# Allegro board ARDUINO_.brd
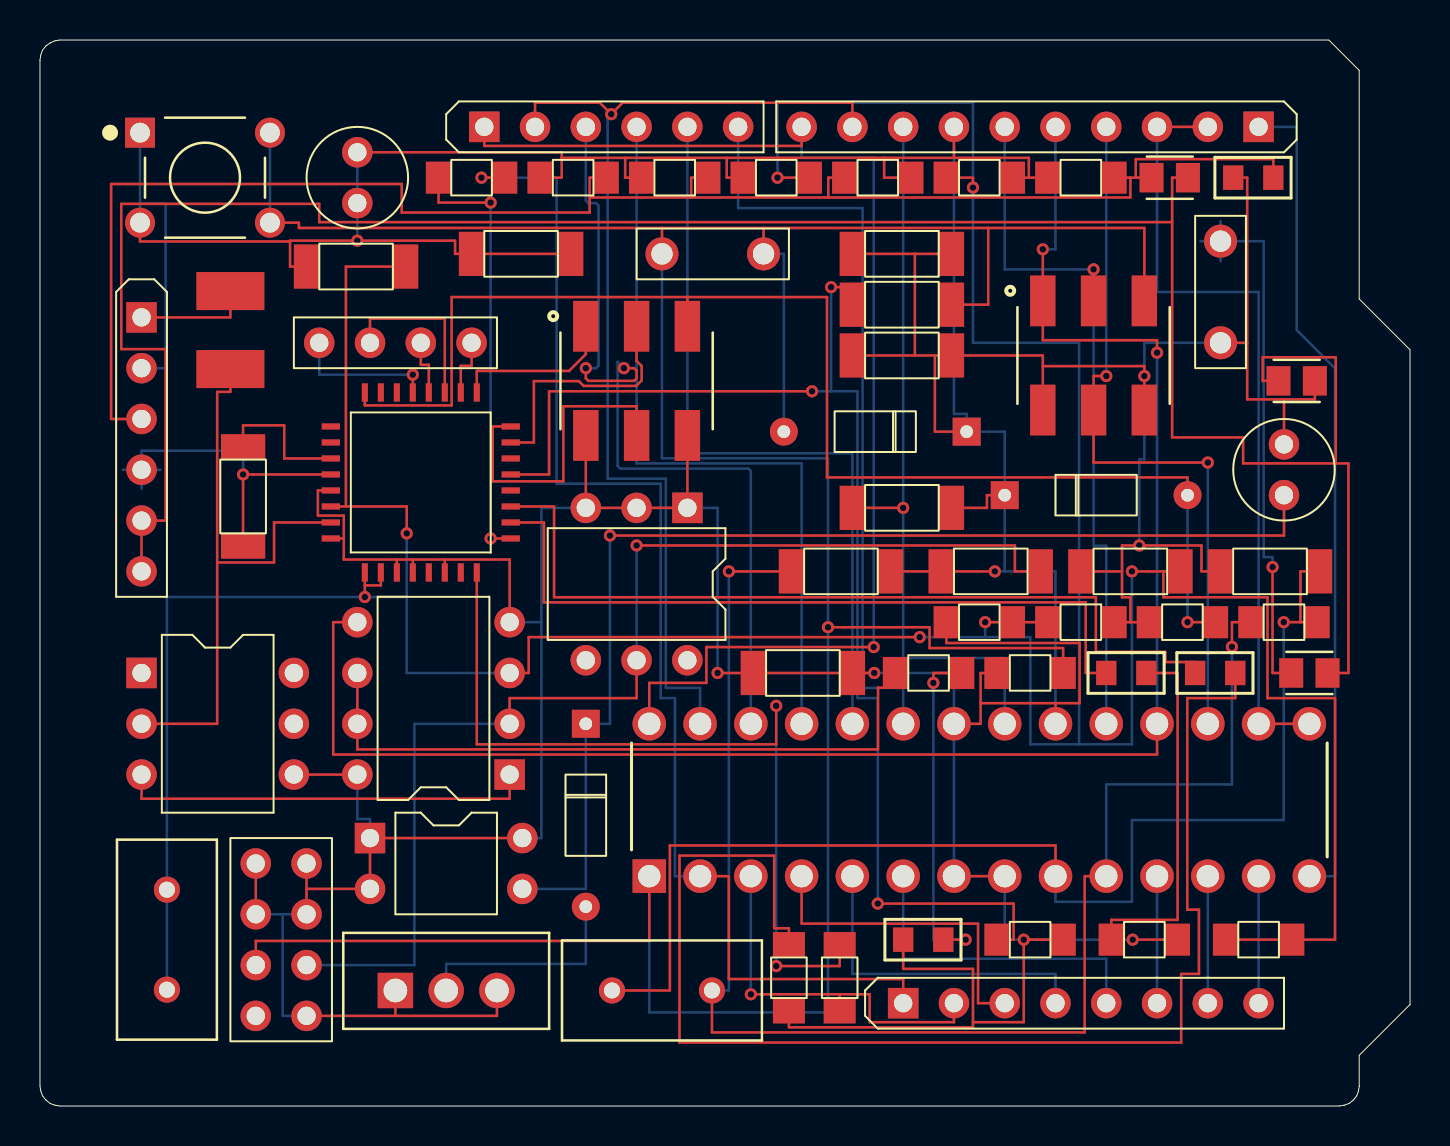
[diagram p0: board, top side]
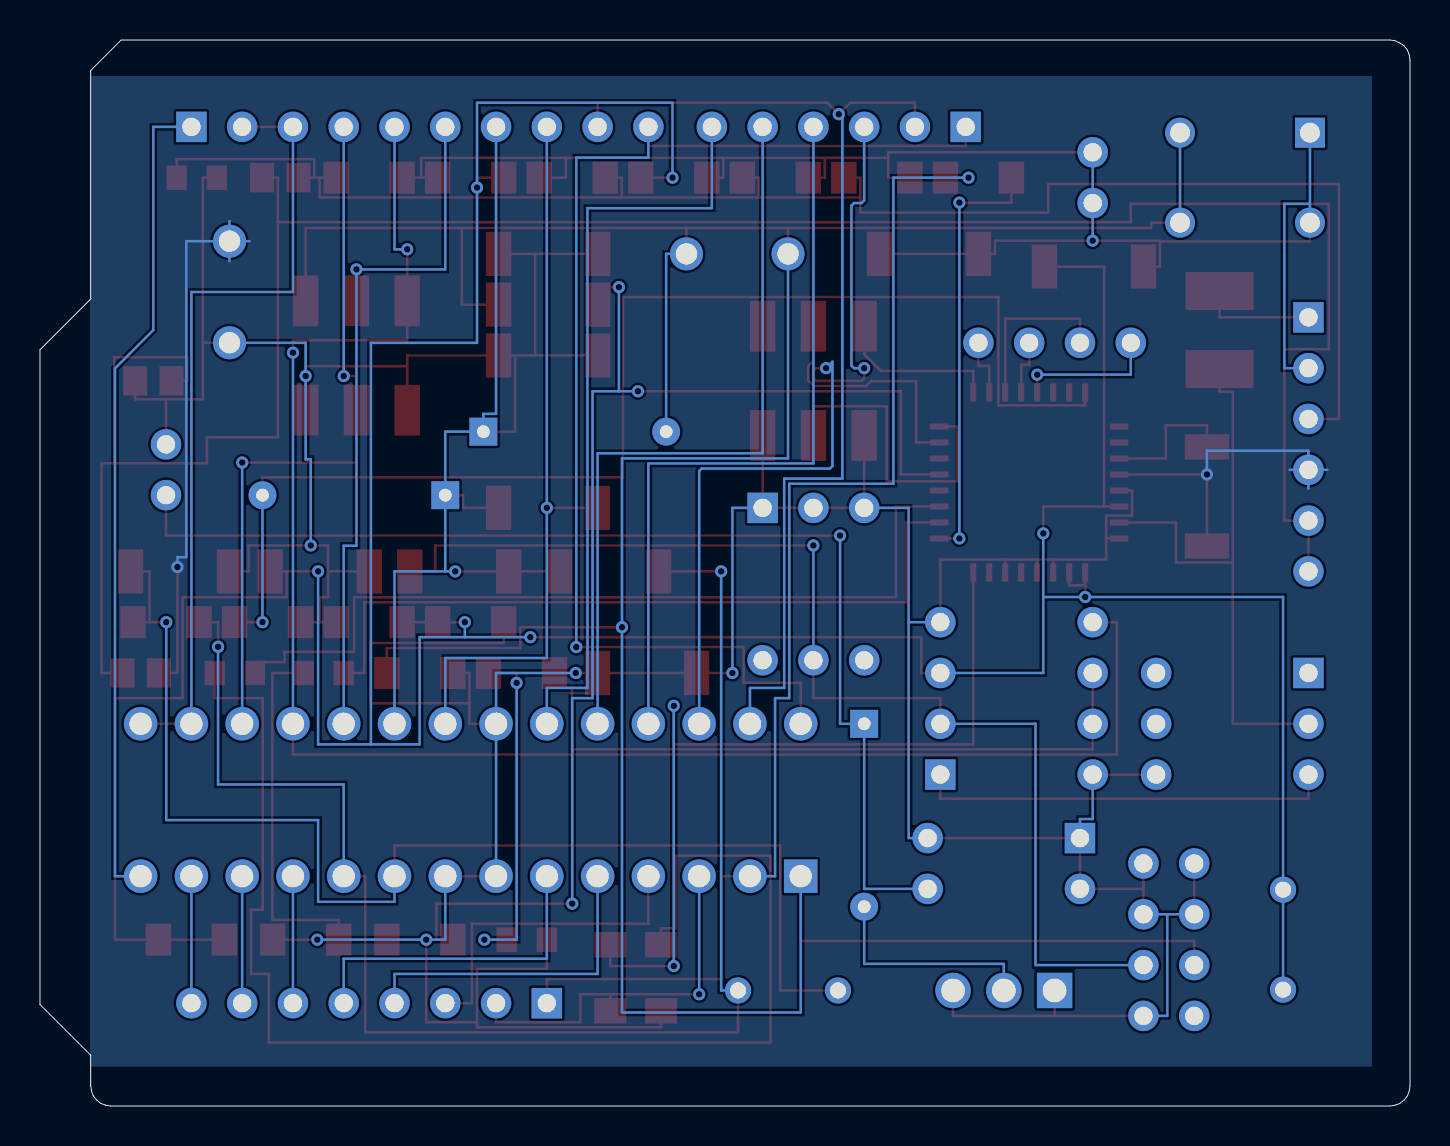
[diagram p1: board, bottom side, seen from below]

Outline 68.53 x 53.3 mm; copper layers: TOP, BOTTOM. Coordinates in mm from the lower left corner of the outline.
Outline path: 0,52.28 0,0.99 0.04,0.74 0.13,0.51 0.3,0.3 0.51,0.13 0.74,0.04 0.99,0 65,0 65.25,0.04 65.49,0.13 65.7,0.3 65.87,0.51 65.95,0.74 66,0.99 66,2.54 68.53,5.08 68.53,37.81 66,40.35 66,51.78 64.47,53.3 0.99,53.3 0.74,53.26 0.51,53.15 0.3,53 0.13,52.79 0.04,52.56 0,52.28

## Design rules (mm)
constraint set DEFAULT: min track width 0.127

## Placement (name value [footprint] x y rotation side)
C1  100n  [SMDCAP]  43.18 37.53 0 top
C2  100n  [SMDCAP]  24.13 42.61 0 top
C3  1u  [SMDCAP]  47.62 26.73 0 top
C4  100n  [SMDCAP]  43.18 29.91 0 top
C5  100n  [SMDCAP]  43.18 40.07 0 top
C6  100n  [SMDCAP]  43.18 42.61 0 top
C7  100n  [SMDCAP]  38.1 21.65 180 top
C8  1u  [SMDCAP]  10.16 30.54 90 top
C9  22p  [SMDCAP]  54.61 26.73 0 top
C11  22p  [SMDCAP]  15.88 41.97 0 top
C12  22p  [SMDCAP]  40 26.73 180 top
C13  22p  [SMDCAP]  61.59 26.73 0 top
CSTCE16M0V53-R0  16MHz  [16M]  31.11 5.78 0 top
D1  M7  [DO35]  27.3 19.11 180 top
D2  CD1206-S01575  [DO35]  46.35 33.72 90 top
D3  CD1206-S01575  [DO35]  48.26 30.54 270 top
F1  500mA  [FUSE]  9.53 38.8 270 top
IC2  ATmega328P-PU  [ATMEGA3]  63.5 19.11 90 top
ICSP  3x2 M  [PIN6]  52.7 37.53 0 top
ICSP1  3x2 M  [PIN6]  29.84 36.26 0 top
IOH  10x1F -H8.5  [SIP10]  60.96 48.96 270 top
IOL  8x1F -H8.5  [SIP8]  43.18 5.14 90 top
J1  CON6  [SIP6]  5.08 39.43 0 top
JP2  2X2 M - NM  [JUMPER4]  21.59 38.16 180 top
L  YELLOW  [SML0805]  43.18 8.32 0 top
L1  BLM21  [BE]  63.5 21.65 0 top
NOREF  -  []  0 0.99 90 top
NOREF#2  -  []  0.99 53.3 0 top
ON  GREEN  [SML0805]  59.69 46.42 0 top
PC1  47u  [CAP196]  62.23 30.54 0 top
PC2  47u  [CAP196]  15.88 45.15 0 top
POWER  8x1F -H8.5  [JUMPER8]  10.79 4.51 0 top
R1  1M  [SMDRES]  60.96 8.32 180 top
R2  1M  [SMDRES]  62.23 24.19 0 top
R12  10K  [SMDRES]  46.99 24.19 0 top
R13  10K  [SMDRES]  52.07 24.19 0 top
RESET-EN  SW KEY-SPST  [CAPCK06]  31.11 42.61 270 top
RN1C  10K  [SMDRES]  57.15 24.19 0 top
RN1D  10K  [SMDRES]  49.53 21.65 0 top
RN2A  1K  [SMDRES]  44.45 21.65 0 top
RN2B  1K  [SMDRES]  55.24 8.32 0 top
RN2C  1K  [SMDRES]  37.46 6.41 270 top
RN2D  1K  [SMDRES]  49.53 8.32 0 top
RN3A  22p  [SMDRES]  36.83 46.42 0 top
RN3B  22R  [SMDRES]  46.99 46.42 0 top
RN3C  22R  [SMDRES]  52.07 46.42 0 top
RN3D  22p  [SMDRES]  41.91 46.42 0 top
RN4A  1K  [SMDRES]  40 6.41 270 top
RN4B  1K  [SMDRES]  21.59 46.42 0 top
RN4C  1K  [SMDRES]  26.67 46.42 0 top
RN4D  1K  [SMDRES]  31.75 46.42 0 top
RX  YELLOW  [SML0805]  53.34 21.65 0 top
SW1  SW KEY-SPST  [CAPCK06]  59.05 38.16 0 top
SW2  RESET  [SW]  8.26 46.42 0 top
T1  FND340P  [DIP6_3]  5.08 21.65 0 top
TX  YELLOW  [SML0805]  57.78 21.65 0 top
U1  NUP1117ST50T3G  [DIP4_3]  16.51 13.4 0 top
U2  SP2985-33DBVR  [DIP6_3]  32.38 29.91 270 top
U3  ATMEGA16U2-MU(R)  [ATMEGA328]  19.05 31.18 90 top
U4  LM358  [DIP8_3]  23.5 16.57 180 top
UNK6X1F-H8.5  AD  [SIP6]  22.23 48.96 90 top
X1  POWERSUPPLY_DC21MMX  [X1]  17.78 5.78 0 top
Y1  16MHz  [16M]  6.35 8.32 90 top
Z1  CG0603ML C-05E  [BE]  56.51 46.42 0 top
Z2  CG0603MLC-05E  [BE]  62.87 36.26 180 top

## Library data of the parts
C1-C9 C11-C13 = CAP NP: Tolerance: ***; User Part Number: ***
CSTCE16M0V53-R0 Y1 = ZTA
D1-D3 = DIODE
F1 = FUSE
IC2 = ATMega8-TQFP32_2
ICSP ICSP1 = CON6A
IOH = CON10: User Part Number: ***
IOL POWER = CON8: User Part Number: ***
J1 = CON6_6: User Part Number: ***
JP2 = CON4A: User Part Number: ***
L ON RX TX = LED
L1 = BEAD
PC1 PC2 = CAP POL: Tolerance: ***; User Part Number: ***
R1 R2 R12 R13 RN1C RN1D RN2A RN2B RN2C RN2D RN3A RN3B RN3C RN3D RN4A RN4B RN4C RN4D = R2: Tolerance: ***; User Part Number: ***
RESET-EN SW1 = SW KEY-SPST: Tolerance: ***; User Part Number: ***
SW2 = SW PUSHBUTTON-SPST-2/SM_0
T1 = NDC7003P/SOT: Tolerance: ***; User Part Number: ***
U1 = NC7SZ66/SOT23_3: Tolerance: ***; User Part Number: ***
U2 = LP2957/TO_5: Tolerance: ***; User Part Number: ***
U3 = ATMega8-TQFP32_9
U4 = LM358_13: Tolerance: ***; User Part Number: ***
UNK6X1F-H8.5 = CON6_5: User Part Number: ***
X1 = BA17805T/TO_4
Z1 Z2 = VARISTOR

## Footprints (pads in the part's own frame, mm; a bottom-side part is the same pattern mirrored in y, then rotated)
16M
  round 1.308 hole 0.8: 1(-2.5,0) 2(2.5,0)
ATMEGA3
  rect 1.676x1.676 hole 1.118: 1(-7.62,33.02)
  round 1.676 hole 1.118: 2(-7.62,30.48) 3(-7.62,27.94) 4(-7.62,25.4) 5(-7.62,22.86) 6(-7.62,20.32) 7(-7.62,17.78) 8(-7.62,15.24) 9(-7.62,12.7) 10(-7.62,10.16) 11(-7.62,7.62) 12(-7.62,5.08) 13(-7.62,2.54) 14(-7.62,0) 15(0,0) 16(0,2.54) 17(0,5.08) 18(0,7.62) 19(0,10.16) 20(0,12.7) 21(0,15.24) 22(0,17.78) 23(0,20.32) 24(0,22.86) 25(0,25.4) 26(0,27.94) 27(0,30.48) 28(0,33.02)
ATMEGA328
  rect 0.914x0.305 smd: 1(-4.5,2.8) 2(-4.5,2) 3(-4.5,1.2) 4(-4.5,0.4) 5(-4.5,-0.4) 6(-4.5,-1.2) 7(-4.5,-2) 8(-4.5,-2.8) 17(4.5,-2.8) 18(4.5,-2) 19(4.5,-1.2) 20(4.5,-0.4) 21(4.5,0.4) 22(4.5,1.2) 23(4.5,2) 24(4.5,2.8)
  rect 0.305x0.914 smd: 9(-2.8,-4.5) 10(-2,-4.5) 11(-1.2,-4.5) 12(-0.4,-4.5) 13(0.4,-4.5) 14(1.2,-4.5) 15(2,-4.5) 16(2.8,-4.5) 25(2.8,4.5) 26(2,4.5) 27(1.2,4.5) 28(0.4,4.5) 29(-0.4,4.5) 30(-1.2,4.5) 31(-2,4.5) 32(-2.8,4.5)
BE
  rect 1.2x1.47 smd: 1(-0.91,0) 2(0.91,0)
CAP196
  round 1.524 hole 0.914: 1(0,0) 2(0,2.54)
CAPCK06
  round 1.651 hole 1.067: 1(0,0) 2(0,5.08)
DIP4_3
  rect 1.524x1.524 hole 0.914: 1(0,0)
  round 1.524 hole 0.914: 2(0,-2.54) 3(7.62,-2.54) 4(7.62,0)
DIP6_3
  rect 1.524x1.524 hole 0.914: 1(0,0)
  round 1.524 hole 0.914: 2(0,-2.54) 3(0,-5.08) 4(7.62,-5.08) 5(7.62,-2.54) 6(7.62,0)
DIP8_3
  rect 1.524x1.524 hole 0.914: 1(0,0)
  round 1.524 hole 0.914: 2(0,-2.54) 3(0,-5.08) 4(0,-7.62) 5(7.62,-7.62) 6(7.62,-5.08) 7(7.62,-2.54) 8(7.62,0)
DO35
  rect 1.397x1.397 hole 0.635: 1(0,0)
  round 1.397 hole 0.635: 2(0,9.144)
FUSE
  rect 1.9x3.4 smd: 1(-1.95,0) 2(1.95,0)
JUMPER4
  round 1.524 hole 0.914: 1(0,0) 2(2.54,0) 3(5.08,0) 4(7.62,0)
JUMPER8
  round 1.524 hole 0.914: 1(0,0) 2(2.54,0) 3(0,2.54) 4(2.54,2.54) 5(0,5.08) 6(2.54,5.08) 7(0,7.62) 8(2.54,7.62)
PIN6
  rect 1.27x2.54 smd: 1(-2.54,2.73) 2(-2.54,-2.73) 3(0,2.73) 4(0,-2.73) 5(2.54,2.73) 6(2.54,-2.73)
SIP6
  rect 1.524x1.524 hole 0.914: 1(0,0)
  round 1.524 hole 0.914: 2(0,-2.54) 3(0,-5.08) 4(0,-7.62) 5(0,-10.16) 6(0,-12.7)
SIP8
  rect 1.524x1.524 hole 0.914: 1(0,0)
  round 1.524 hole 0.914: 2(0,-2.54) 3(0,-5.08) 4(0,-7.62) 5(0,-10.16) 6(0,-12.7) 7(0,-15.24) 8(0,-17.78)
SIP10
  rect 1.524x1.524 hole 0.914: 1(0,0)
  round 1.524 hole 0.914: 2(0,-2.54) 3(0,-5.08) 4(0,-7.62) 5(0,-10.16) 6(0,-12.7) 7(0,-15.24) 8(0,-17.78) 9(0,-20.32) 10(0,-22.86)
SMDCAP
  rect 1.27x2.21 smd: 1(-2.54,0) 2(2.413,0)
SMDRES
  rect 1.27x1.6 smd: 1(-1.651,0) 2(1.651,0)
SML0805
  rect 1.016x1.219 smd: 1(0,0) 2(2.007,0)
SW
  rect 1.498x1.498 hole 0.99: 1(-3.25,2.25)
  round 1.498 hole 0.99: 2(-3.25,-2.25) 3(3.25,2.25) 4(3.25,-2.25)
X1
  rect 1.77x1.77 hole 1.18: 1(0,0)
  round 1.77 hole 1.18: 2(2.54,0) 3(5.08,0)

## Nets
+3V3: C3.2 POWER.4 U2.5(OUT) U4.2
+5V: C1.1 C1.2 C2.1 C2.2 C3.1 C4.2 C6.1 C6.2 C7.1 C7.2 C9.1 C11.1 C12.1 C13.1 D2.1(K) D3.1(K) IC2.7 IC2.8 IC2.20 IC2.22 ICSP.2 ICSP.6 ICSP1.2 ICSP1.6 IOH.7 J1.2 L.1(CATHODE) ON.1(CATHODE) PC1.2 PC2.1 PC2.2 POWER.2 POWER.5 POWER.6 POWER.7 POWER.8 R12.1 R13.2 RN1C.1 RN1D.1 RN2B.2 RN2C.2 RN2D.2 RN3A.1 RN3B.2 RN3C.1 RN3D.2 RN4C.1 RN4D.1 SW1.1 SW2.1 SW2.2 T1.4 U1.1 U1.2 U1.4(OUT) U2.1 U2.2 U2.3 U3.3 U3.4 U3.6 U3.29 U3.32 U4.4 U4.8 X1.1 X1.3 Z2.1
1: C9.2 C11.2 R1.1 R1.2 R12.2 R13.1 RN3A.2 RN3B.1 U3.1 U3.2(XTAL2(PC0)) U3.30 U4.3 Y1.1 Y1.2
5: J1.3 ON.2 RN3C.2 RN3D.1 RN4C.2 RN4D.2 Z1.1
AD0: IC2.23 UNK6X1F-H8.5.6
AD1: IC2.24 UNK6X1F-H8.5.5
AD2: IC2.25 UNK6X1F-H8.5.4
AD3: IC2.26 UNK6X1F-H8.5.3
AD4/SDA: IC2.27 IOH.9 UNK6X1F-H8.5.2
AD5/SCL: IC2.28 IOH.10 UNK6X1F-H8.5.1
AREF: C4.1 IC2.21 IOH.8
CSK2: ICSP1.3 U3.15
IO0: IC2.2 IOL.1 RN4B.2
IO1: IC2.3 IOL.2 RN4A.2
IO2: IC2.4 IOL.3
IO3: IC2.5 IOL.4
IO4: IC2.6 IOL.5
IO5: IC2.11 IOL.6
IO6: IC2.12 IOL.7
IO7: IC2.13 IOL.8
IO8: IC2.14 IOH.1
IO9: IC2.15 IC2.16 IOH.2 IOH.3
L13: RN2A.1 U4.6 U4.7(OUT)
M8RXD: RN4B.1 U3.9
M8TXD: RN4A.1 U3.8
MISO: IC2.17 ICSP.4 IOH.4
MISO2: ICSP1.1 U3.17
MOSI2: ICSP1.4 U3.16
PB4: JP2.1 U3.18
PB5: JP2.3 U3.19
PB6: JP2.2 U3.20
PB7: JP2.4 U3.21
PWRIN: D1.2 X1.2
RESET: C5.2 D2.2 IC2.1 ICSP.5 POWER.3 RESET-EN.1 RESET-EN.2 RN1D.2 SW2.3 SW2.4
RESET2: D3.2 ICSP1.5 RN1C.2 U3.24
RXLED: RX.1(CATHODE) U3.10
SCK: IC2.18 ICSP.1 IOH.5 U4.5
TP_VUCAP: C8.2 U3.27
TXLED: TX.1(CATHODE) U3.11
UGND: C8.1 J1.4 L1.1 SW1.2 U3.28
USBVCC: F1.2 T1.2 U3.31
USHIELD: J1.5 J1.6(PS2) L1.2 Z1.2 Z2.2
XTAL1: C13.2 CSTCE16M0V53-R0.1 IC2.9 R2.2
XTAL2: C12.2 CSTCE16M0V53-R0.2 IC2.10(XTAL2) R2.1
XUSB: F1.1 J1.1
N06680: C5.1 RN2D.1 U3.13
N09729: RN2C.1 TX.2
N10359: IC2.19 ICSP.3 IOH.6
N14807: T1.3 U4.1
N20263: D1.1(K) PC1.1 U1.3
N096150: RN2B.1 RX.2
N183381: L.2 RN2A.2

Pads without a net: POWER 1; T1 1 5 6; U2 4 6; U3 5 7 12 14 22 23 25 26

## Via types
v1: diameter 0.61, hole 0.33, TOP to BOTTOM, 46 vias

## Routing (per net, layer and track width the routed paths; a pad name or vN(x,y) marks a point on that pad's centre or on a via; arc(x,y) is an arc through that point)
+3V3: length 59
  TOP w0.127: U2.5 29.84,20.39 23.5,20.39 U4.2 ; C3.2 48.77,26.73 48.77,28.03 v1(29.84,28.03)
  BOTTOM w0.127: POWER.4 18.73,7.05 18.73,19.11 U4.2 ; v1(29.84,28.03) U2.5
+5V: length 411.5
  TOP w0.127: v1(33.9,21.65) C7.2 C7.1 v1(41.73,21.65) ; 45.72,47.41 IOH.7 ; 45.72,47.41 42.23,47.41 ; 45.72,47.41 49.47,47.41 49.47,46.42 ; C6.1 43.76,42.61 ; 43.76,42.61 C6.2 ; 43.76,42.61 43.76,37.53 ; D3.1 47.37,30.54 47.37,29.91 C4.2 ; 42.23,47.41 42.23,46.42 RN3D.2 ; 42.23,47.41 34.35,47.41 ; 13.34,10.86 U1.2 U1.1 U1.4 ; 13.34,10.86 POWER.6 ; 13.34,10.86 POWER.8 ; 50.8,20.14 52.01,20.14 52.01,23.15 45.34,23.15 R12.1 ; 50.8,20.14 IC2.20 ; 50.8,20.14 47.05,20.14 ; IC2.22 47.05,19.11 47.05,20.14 ; L.1 43.18,6.86 46.67,6.86 46.67,4.19 ; 62.23,35.33 63.77,35.33 Z2.1 ; 62.23,35.33 PC1.2 ; 62.23,35.33 60.39,35.33 60.39,38.16 ; 12.7,16.57 U4.8 ; 20.25,27.32 23.5,27.32 U4.4 ; 20.25,27.32 U3.6 ; 20.25,27.32 18.65,27.32 ; ICSP.2 50.16,36.99 ; 50.16,36.99 55.24,36.99 v1(55.24,36.5) ICSP.6 ; 50.16,36.99 50.16,37.53 C1.2 44.77,37.53 ; POWER.7 POWER.5 ; D2.1 44.77,33.72 44.77,37.53 ; C12.1 C3.1 v1(47.76,26.73) ; 12.51,43.23 5.01,43.23 SW2.2 ; 12.51,43.23 12.51,41.97 C11.1 ; 12.51,43.23 12.51,43.27 v1(15.88,43.27) 20.76,43.27 20.76,42.61 C2.1 C2.2 ; 44.77,37.53 43.76,37.53 ; 43.76,37.53 C1.1 ; RN2B.2 v1(54.66,8.32) ; 54.13,26.73 54.13,25.44 54.55,25.44 54.55,24.19 ; 54.13,26.73 54.13,28.03 v1(54.99,28.03) 58.1,28.03 58.1,26.73 C13.1 ; 54.13,26.73 C9.1 ; 49.47,46.42 RN3C.1 ; 49.47,46.42 RN3B.2 ; 60.39,38.16 60.39,46.42 ON.1 ; 60.39,38.16 SW1.1 ; RN3A.1 34.35,46.42 34.35,47.41 ; RN2C.2 37.46,3.93 46.67,3.93 46.67,4.19 ; 34.35,47.41 29.27,47.41 ; 54.55,24.19 RN1C.1 ; 54.55,24.19 R13.2 ; 17.78,4.51 22.86,4.51 X1.3 ; 17.78,4.51 POWER.2 ; 17.78,4.51 X1.1 ; 30.1,46.42 29.27,46.42 29.27,47.41 ; 29.27,47.41 26.1,47.41 ; RN1D.1 47.05,21.65 47.05,20.14 ; 15.2,28.38 15.2,29.52 13.9,29.52 13.9,30.78 U3.29 ; 15.2,28.38 U3.32 ; 15.2,28.38 15.2,27.32 17.85,27.32 ; ICSP1.6 U2.1 U2.2 U2.3 ICSP1.2 ; 26.1,47.41 26.1,47.69 PC2.2 ; 26.1,47.41 26.1,46.42 RN4C.1 ; 18.65,27.32 17.85,27.32 ; 18.65,27.32 U3.4 ; 46.67,4.19 49.21,4.19 v1(49.21,8.32) RN2D.2 ; 17.85,27.32 U3.3 ; IC2.8 IC2.7
  BOTTOM w0.127: U1.1 16.51,14.35 15.88,14.35 U4.8 ; v1(41.73,21.65) 45.72,21.65 IC2.22 IC2.7 ; SW2.1 5.01,45.11 ; 5.01,45.11 6.29,45.11 6.29,36.89 J1.2 ; 5.01,45.11 SW2.2 ; 25.08,24.19 25.08,13.4 U1.4 ; 25.08,24.19 U4.4 ; 25.08,24.19 25.08,29.91 U2.3 ; PC2.2 PC2.1 v1(15.88,43.27) ; IC2.8 48.26,8.32 v1(49.21,8.32) v1(54.66,8.32) ; POWER.2 12.14,4.51 12.14,9.59 ; 48.26,26.73 D3.1 48.26,33.72 D2.1 46.35,34.61 45.72,34.61 IOH.7 ; 48.26,26.73 v1(47.76,26.73) ; 48.26,26.73 50.8,26.73 IC2.20 ; 12.14,9.59 POWER.6 ; 12.14,9.59 POWER.5 ; U2.1 33.9,29.91 v1(33.9,21.65) ; v1(54.99,28.03) 54.99,32.33 55.24,32.33 v1(55.24,36.5) 55.24,38.16 SW1.1
1: length 206.6
  TOP w0.127: R13.1 R12.2 v1(47.28,24.19) ; 16.25,26.03 v1(16.25,25.45) ; 16.25,26.03 U3.1 ; 16.25,26.03 17.05,26.03 U3.2 ; 15.3,29.98 15.3,41.97 C11.2 ; 15.3,29.98 18.35,29.98 v1(18.35,28.63) ; 15.3,29.98 U3.30 ; C9.2 56.2,26.73 ; 56.2,26.73 56.2,25.44 61.4,25.44 61.4,20.39 64.78,20.39 64.78,8.32 R1.1 59.31,8.32 ; 56.2,26.73 v1(54.62,26.73) ; v1(46.67,45.92) 46.67,46.42 RN3B.1 ; U4.3 24.45,21.65 24.45,23.44 v1(44.01,23.44) ; RN3A.2 v1(36.89,46.42)
  BOTTOM w0.127: 47.28,23.44 49.54,23.44 49.54,18.08 51.98,18.08 ; 47.28,23.44 v1(44.01,23.44) ; 47.28,23.44 v1(47.28,24.19) ; v1(36.89,46.42) 36.89,50.16 46.67,50.16 v1(46.67,45.92) 46.67,38.16 51.98,38.16 51.98,18.08 ; v1(54.62,26.73) 54.62,18.08 51.98,18.08 ; U4.3 18.35,21.65 18.35,25.45 ; 18.35,25.45 v1(16.25,25.45) 6.35,25.45 Y1.2 Y1.1 ; 18.35,25.45 v1(18.35,28.63)
5: length 83.5
  TOP w0.127: Z1.1 54.81,46.42 ; 54.81,46.42 54.55,46.42 ; 54.81,46.42 54.81,47.34 61.7,47.34 ON.2 ; 32.58,45.43 32.58,46.42 RN4D.2 ; 32.58,45.43 39.43,45.43 ; 32.58,45.43 27.5,45.43 ; 39.43,45.43 54.55,45.43 54.55,46.42 ; 39.43,45.43 39.43,46.42 RN3D.1 ; 27.5,45.43 27.5,44.67 18.1,44.67 18.1,46.1 3.56,46.1 3.56,34.35 5.08,34.35 ; 27.5,45.43 27.5,46.42 RN4C.2 ; 54.55,46.42 RN3C.2
AD0: length 38.1
  BOTTOM w0.127: UNK6X1F-H8.5.6 34.92,44.89 41.15,44.89 41.15,20.9 43.18,20.9 IC2.23
AD1: length 38.1
  BOTTOM w0.127: UNK6X1F-H8.5.5 32.38,32.64 40.64,32.64 IC2.24
AD2: length 38.1
  BOTTOM w0.127: IC2.25 38.1,32.13 29.84,32.13 UNK6X1F-H8.5.4
AD3: length 42.4
  TOP w0.127: v1(27.3,36.89) 27.3,36.38 27.43,36.26 29.72,36.26 29.84,36.38 29.84,36.76 29.72,36.89 v1(29.21,36.89)
  BOTTOM w0.127: v1(29.21,36.89) 29.21,36.89 28.89,37.21 28.89,32 29.02,31.87 35.43,31.87 35.56,31.75 IC2.26 ; v1(27.3,36.89) 27.81,36.89 27.94,37.02 27.94,45.02 27.81,45.15 27.43,45.15 27.3,45.27 UNK6X1F-H8.5.3
AD4/SDA: length 53.9
  TOP w0.127: IOH.9 40.64,50.16 29.15,50.16 v1(28.57,49.59) 28,50.16 24.77,50.16 UNK6X1F-H8.5.2
  BOTTOM w0.127: 33.02,19.11 33.02,20.9 31.31,20.9 31.31,31.37 28.4,31.37 28.4,49.41 v1(28.57,49.59)
AD5/SCL: length 62.5
  TOP w0.127: IOH.10 38.1,48 22.23,48 UNK6X1F-H8.5.1 ; 30.48,19.11 30.48,21.16 33.34,21.16 33.34,22.95 v1(41.71,22.95)
  BOTTOM w0.127: v1(41.71,22.95) 41.71,47.42 38.1,47.42 IOH.10
AREF: length 37.5
  TOP w0.127: C4.1 v1(43.18,29.91)
  BOTTOM w0.127: IC2.21 48.26,22.4 43.18,22.4 v1(43.18,29.91) IOH.8
CSK2: length 12.6
  TOP w0.127: U3.15 24.71,33.18 24.71,36.24 26.96,36.24 27.2,36 29.82,36 30.1,36.28 30.1,37 29.84,37.25 ICSP1.3
IO0: length 63.5
  TOP w0.127: IOL.1 43.18,6.35 34.46,6.35 34.46,11.49 IC2.2 ; RN4B.2 v1(22.09,46.42)
  BOTTOM w0.127: v1(22.09,46.42) 25.84,46.42 25.84,31.11 31.05,31.11 31.05,20.39 31.76,20.39 31.76,11.49 IC2.2
IO1: length 19.2
  TOP w0.127: 40,5.59 RN4A.2 ; 40,5.59 41.5,5.59 41.5,4.19 45.72,4.19 IOL.2 ; 40,5.59 v1(35.56,5.59)
  BOTTOM w0.127: IC2.3 v1(35.56,5.59)
IO2: length 16.5
  TOP w0.127: IOL.3 46.93,5.14 46.93,9.12 38.1,9.12 IC2.4
IO3: length 16.5
  BOTTOM w0.127: 50.8,5.14 50.8,6.6 40.64,6.6 IC2.5
IO4: length 16.5
  BOTTOM w0.127: 53.34,5.14 53.34,7.36 43.18,7.36 IC2.6
IO5: length 6.3
  BOTTOM w0.127: IC2.11 55.88,5.14
IO6: length 6.3
  BOTTOM w0.127: IC2.12 58.42,5.14
IO7: length 6.3
  BOTTOM w0.127: IC2.13 60.96,5.14
IO8: length 41.4
  BOTTOM w0.127: IC2.14 64.78,11.49 64.78,36.88 62.87,38.8 62.87,48.96 IOH.1
IO9: length 40
  TOP w0.127: IC2.15 IC2.16 ; IOH.2 IOH.3
  BOTTOM w0.127: IOH.3 55.88,40.7 60.96,40.7 IC2.16
L13: length 34.6
  TOP w0.127: U4.6 U4.7 15.88,17.83 41.92,17.83 41.92,20.91 42.8,20.91 RN2A.1
M8RXD: length 21.7
  TOP w0.127: v1(22.54,45.17) 19.94,45.17 RN4B.1 ; U3.9 v1(22.54,28.38)
  BOTTOM w0.127: v1(22.54,28.38) v1(22.54,45.17)
M8TXD: length 42.8
  TOP w0.127: v1(36.83,20.01) 36.83,18.08 21.85,18.08 U3.8 ; RN4A.1 40,7 v1(36.83,7)
  BOTTOM w0.127: v1(36.83,20.01) v1(36.83,7)
MISO: length 36.2
  TOP w0.127: v1(53.34,36.5) 52.7,36.5 ICSP.4 52.7,32.17 v1(58.42,32.17)
  BOTTOM w0.127: IC2.17 v1(58.42,32.17) ; IOH.4 v1(53.34,36.5)
MISO2: length 8.3
  TOP w0.127: U3.17 21.85,36.75 26.47,36.75 27.3,37.59 ICSP1.1
MOSI2: length 16.1
  TOP w0.127: ICSP1.4 29.84,34.99 26.18,34.99 26.18,31.23 22.65,31.23 22.65,33.98 U3.16
PB4: length 3
  TOP w0.127: U3.18 21.05,37.01 21.59,37.01 JP2.1
PB5: length 8.6
  TOP w0.127: JP2.3 16.51,39.37 20.25,39.37 U3.19
PB6: length 2.9
  TOP w0.127: JP2.2 19.05,37.06 19.45,37.06 U3.20
PB7: length 7.2
  TOP w0.127: U3.21 v1(18.65,36.57)
  BOTTOM w0.127: v1(18.65,36.57) 13.97,36.57 JP2.4
PWRIN: length 11.2
  BOTTOM w0.127: D1.2 27.3,7.11 20.32,7.11 X1.2
RESET: length 170.5
  TOP w0.127: 36.2,43.9 31.11,43.9 ; 36.2,43.9 RESET-EN.2 ; 36.2,43.9 47.43,43.9 ; 31.11,43.9 RESET-EN.1 ; 31.11,43.9 12.95,43.9 12.95,44.17 SW2.4 ; 47.43,43.9 47.43,40.07 C5.2 ; 47.43,43.9 55.24,43.9 ICSP.5 ; IC2.1 30.48,8.25 10.79,8.25 POWER.3 ; RN1D.2 51.18,22.9 44.5,22.9 44.5,23.94 v1(39.42,23.94)
  BOTTOM w0.127: SW2.3 SW2.4 ; RESET-EN.1 31.11,32.38 39.42,32.38 v1(39.42,23.94) 39.42,4.68 30.48,4.68 IC2.1 ; RESET-EN.2 37.21,42.61 D2.2
RESET2: length 66.3
  TOP w0.127: RN1C.2 v1(57.4,24.19) ; U3.24 16.25,35.03 20.59,35.03 20.59,40.45 32.38,40.45 ; 32.38,40.45 ICSP1.5 ; 32.38,40.45 39.37,40.45 39.37,31.43 57.4,31.43 D3.2
  BOTTOM w0.127: v1(57.4,24.19) D3.2
RXLED: length 37.3
  TOP w0.127: RX.1 52.31,21.65 52.31,25.18 25.21,25.18 25.21,29.18 U3.10
SCK: length 86.8
  TOP w0.127: v1(50.16,42.83) ICSP.1 50.16,38.29 55.88,38.29 v1(55.88,37.67) ; IC2.18 55.88,17.57 14.67,17.57 14.67,24.19 U4.5
  BOTTOM w0.127: IOH.5 50.8,42.83 v1(50.16,42.83) ; v1(55.88,37.67) IC2.18
TP_VUCAP: length 7.1
  TOP w0.127: U3.27 12.22,32.38 12.22,34.03 10.16,34.03 C8.2
TXLED: length 42.6
  TOP w0.127: U3.11 25.72,29.98 25.72,25.44 52.82,25.44 52.82,22.71 56.3,22.71 56.3,22.2 57.78,22.2 TX.1
UGND: length 46.1
  TOP w0.127: C8.1 v1(10.16,31.58) 10.66,31.58 U3.28 ; L1.1 61.66,21.65 v1(61.66,26.95)
  BOTTOM w0.127: SW1.2 59.05,44.24 ; SW1.2 59.05,42.24 ; SW1.2 58.05,43.24 ; SW1.2 61.21,43.24 61.21,27.44 61.66,27.44 v1(61.66,26.95) ; 5.08,30.87 5.08,31.81 ; 5.08,31.81 5.08,32.76 10.16,32.76 v1(10.16,31.58) ; 5.08,31.81 4.14,31.81 ; 5.08,31.81 6.02,31.81
USBVCC: length 29.9
  TOP w0.127: 8.86,27.18 8.86,35.71 9.53,35.71 F1.2 ; 8.86,27.18 11.71,27.18 11.71,29.18 U3.31 ; 8.86,27.18 8.86,19.11 5.08,19.11
USHIELD: length 121.6
  TOP w0.127: 56.63,44.19 13.97,44.19 13.97,45.11 4.07,45.11 4.07,37.84 6.29,37.84 6.29,29.27 5.08,29.27 5.08,26.73 ; 56.63,44.19 56.63,46.42 57.42,46.42 ; 56.63,44.19 56.63,33.43 60.19,33.43 60.19,32.13 64.82,32.13 ; 64.82,32.13 65.45,32.13 65.45,21.65 L1.2 ; 64.82,32.13 64.82,37.44 61.16,37.44 61.16,36.26 61.95,36.26
XTAL1: length 62.8
  TOP w0.127: R2.2 63.06,24.19 ; 63.06,24.19 63.06,26.73 C13.2 ; 63.06,24.19 v1(62.22,24.19) ; CSTCE16M0V53-R0.1 31.51,5.78 31.51,13.03 50.8,13.03 IC2.9
  BOTTOM w0.127: v1(62.22,24.19) 62.22,14.3 54.62,14.3 54.62,10.21 50.8,10.21 IC2.9
XTAL2: length 74.5
  TOP w0.127: IC2.10 52.26,11.49 52.26,3.68 33.61,3.68 CSTCE16M0V53-R0.2 ; C12.2 v1(34.46,26.73) ; R2.1 59.63,24.19 v1(59.63,22.96)
  BOTTOM w0.127: v1(59.63,22.96) 59.63,16.08 53.34,16.08 IC2.10 ; v1(34.46,26.73) 34.46,5.78 CSTCE16M0V53-R0.2
XUSB: length 5.8
  TOP w0.127: F1.1 9.53,39.43 J1.1
N06680: length 64.7
  TOP w0.127: C5.1 40.64,40.94 v1(39.57,40.94) ; U3.13 25.47,31.58 25.47,35.74 v1(38.62,35.74) ; v1(41.91,10.12) 48.7,10.12 48.7,8.32 RN2D.1
  BOTTOM w0.127: v1(39.57,40.94) 39.57,35.74 ; 39.57,35.74 v1(38.62,35.74) ; 39.57,35.74 40.89,35.74 40.89,20.39 41.91,20.39 v1(41.91,10.12)
N09729: length 66.7
  TOP w0.127: TX.2 59.79,20.39 57.39,20.39 57.39,9.81 57.98,9.81 57.98,6.6 57.09,6.6 57.09,3.17 31.99,3.17 31.99,12.52 36.73,12.52 36.73,8.89 37.46,8.89 RN2C.1
N10359: length 36.5
  TOP w0.127: ICSP.3 v1(52.7,41.83)
  BOTTOM w0.127: IC2.19 53.34,28.01 52.7,28.01 v1(52.7,41.83) 48.26,41.83 IOH.6
N14807: length 20.8
  TOP w0.127: 5.08,16.57 5.08,15.36 23.5,15.36 U4.1
N20263: length 57.8
  TOP w0.127: PC1.1 62.23,28.52 v1(28.51,28.52)
  BOTTOM w0.127: v1(28.51,28.52) 28.51,19.11 D1.1 27.3,10.86 U1.3
N096150: length 18.2
  TOP w0.127: RX.2 56.91,21.65 56.91,9.31 53.59,9.31 RN2B.1
N183381: length 17.5
  TOP w0.127: v1(44.69,21.16) 44.69,21.65 RN2A.2 ; L.2 v1(46.3,8.32)
  BOTTOM w0.127: v1(46.3,8.32) 44.69,8.32 v1(44.69,21.16)

## Copper pours and planes (outline as drawn; the poured copper is in the pictures)
UGND on BOTTOM: 1.9,51.5 1.9,1.97 66.04,1.97 66.04,51.5 ; 10 cut-outs

## Text on the board
PAGE_OUTLINE: 68.5346 | FIGURE | FINISHED_SIZE | 0.3302 | 0.635 | 0.8 | 0.9144 | 0.99 | 1.0668 | 1.1176 | 1.18 | DRILL CHART: TOP to BOTTOM | ALL UNITS ARE IN MILLIMETERS | PLATED | QTY | 46 | 6 | 4 | 70 | 28 | 3
